# Allegro board SDR_2832.brd
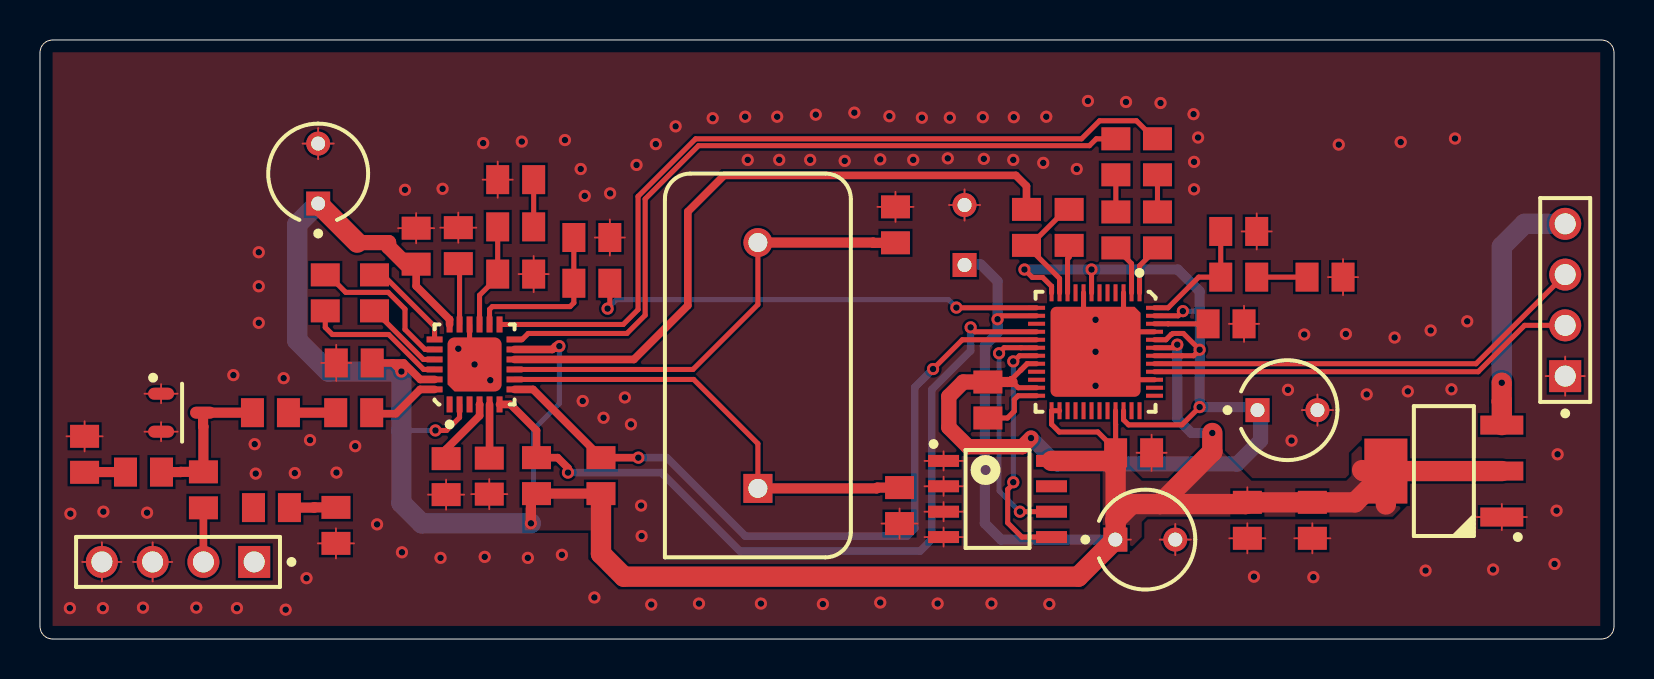
[diagram p0: board, top side]
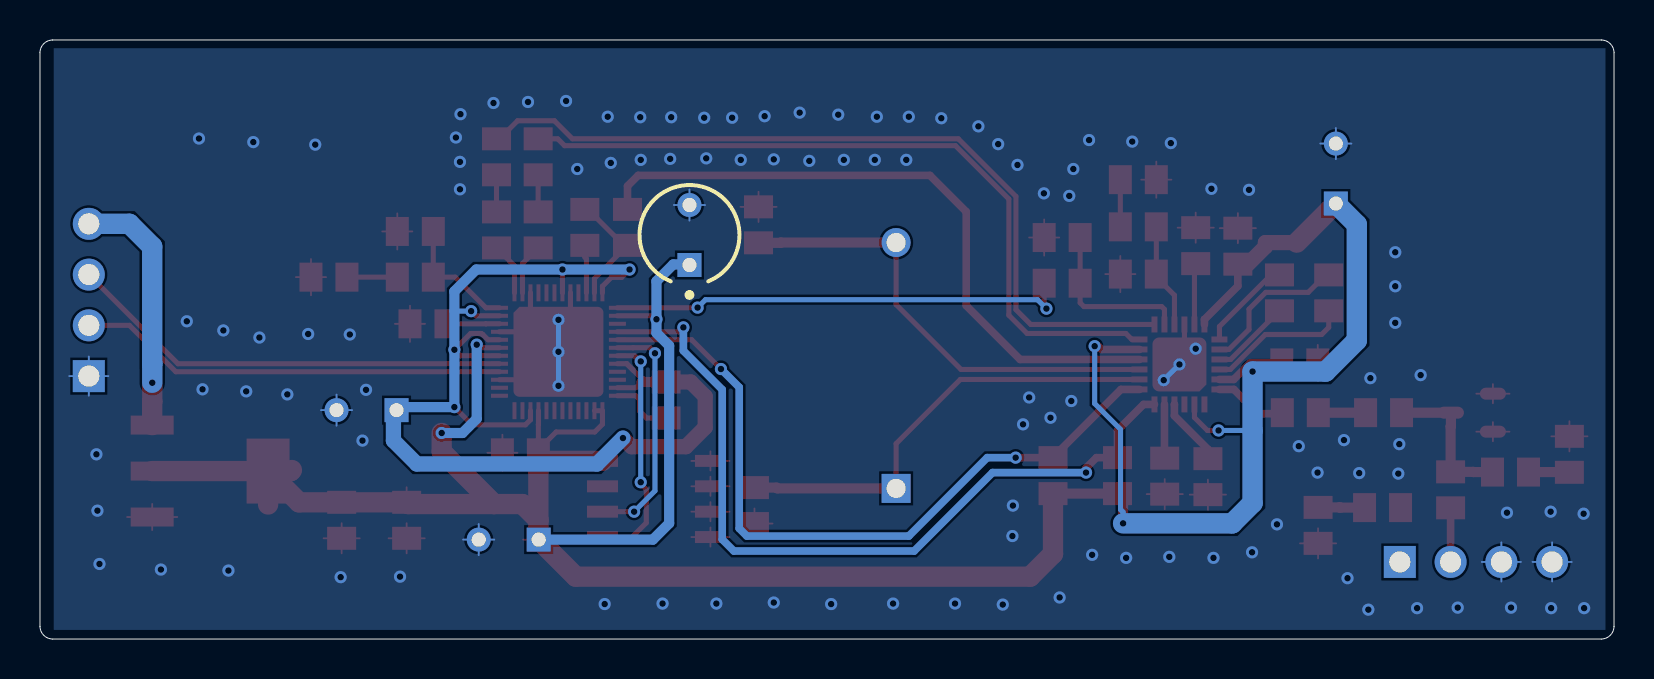
[diagram p1: board, bottom side, seen from below]

Outline 78.74 x 29.97 mm; copper layers: TOP, BOTTOM. Coordinates in mm from the lower left corner of the outline.
Outline path: 0,29.34 arc(0.19,29.79) 0.63,29.97 78.1,29.97 arc(78.55,29.79) 78.74,29.34 78.74,0.63 arc(78.55,0.19) 78.1,0 0.63,0 arc(0.19,0.19) 0,0.63 0,29.34

## Placement (name value [footprint] x y rotation side)
C1  330pF  [R0805]  11.53 11.33 0 top
C2  220pF/NC  [R0805]  2.23 9.24 270 top
C3  27pF/10nF  [R0805]  8.18 7.46 90 top
C4  NC/100nF  [R0805]  14.8 5.69 270 top
C5  1uF  [R0805]  20.32 8.12 90 top
C6  100nF  [R0805]  22.48 8.15 90 top
C7  20pF  [R0805]  43 6.68 90 top
C8  20pF  [R0805]  42.8 20.72 270 top
C9  10nF  [R0805]  15.72 13.81 180 top
C10  100nF  [R0805]  18.82 19.66 90 top
C11  100nF  [R0805]  20.93 19.68 270 top
C12  330nF  [R0805]  23.8 18.26 180 top
C13  6.8nF  [R0805]  23.8 22.98 0 top
C14  100nF  [R0805]  53.82 20.47 90 top
C15  100nF  [R0805]  55.9 20.47 90 top
C16  100nF  [R0805]  27.61 20.09 0 top
C17  220uF  [CAPPRD300W51D500H1295P]  62.4 11.45 0 top
C18  6.8nF/NC  [R0805]  49.35 20.6 90 top
C19  10uF  [CAPPRD300W51D500H1295P]  13.92 23.29 90 top
C20  0.1uF  [CAPPRD300W51D500H1295P]  55.29 4.98 0 top
C22  330nF  [R0805]  59.97 20.39 180 top
C23  6.8nF  [R0805]  64.28 18.11 180 top
C26  100nF  [R0805]  59.33 15.77 0 top
C27  100nF  [R0805]  54.71 9.32 180 top
C28  100nF  [R0805]  63.65 5.94 270 top
C29  330pF  [R0805]  60.4 5.94 90 top
C30  10uF  [CAPPRD300W51D500H1295P]  46.25 20.22 90 bottom
D1  BAV99/SOT  [SOT95P237X112-3N]  7.11 11.33 0 top
J1  HEADER 4  [HDRV4W64P254_1X4_1016X254X838P]  76.3 13.15 90 top
J2  HEADER 4  [HDRV4W64P254_1X4_1016X254X838P]  10.72 3.86 180 top
L1  8.2nH  [R0805]  15.69 11.33 0 top
L2  100nH/NC  [R0805]  5.18 8.35 0 top
L3  NC/180nH  [R0805]  11.58 6.58 0 top
L4  150nH  [R0805]  14.27 17.32 90 top
L5  150nH  [R0805]  16.74 17.32 90 top
L6  4.7uH  [R0805]  47.42 11.96 90 top
R2  1.8K  [R0805]  23.8 20.62 0 top
R3  10K  [R0805]  27.61 17.8 0 top
R4  220  [R0805]  55.9 24.13 270 top
R5  220  [R0805]  53.82 24.13 270 top
R7  NC/100  [R0805]  51.48 20.6 270 top
R8  1.8K  [R0805]  59.97 18.11 0 top
R9  4.7K  [R0805]  28.06 8.18 90 top
R10  4.7K  [R0805]  24.84 8.18 270 top
U1  RTL2832U  [RTL2832U_QFN48]  52.8 14.37 270 top
U2  R820t  [R820T]  21.74 13.74 90 top
U3  24C02/SO8  [AT24C02_SOP8]  47.9 7.01 0 top
U4  AMS1117  [AMS1117_SOT223]  70.23 8.4 180 top
Y1  28.8MHz  [OSC_2PIN]  35.91 13.69 90 top

## Library data of the parts
C1-C16 C18 C22 C23 C26-C29 = CAPACITOR NON-POL
C17 C19 C20 C30 = CAP
D1 = BAV99/SOT
J1 J2 = HEADER 4
L1-L6 = INDUCTOR AUDIO
R2-R5 R7-R10 = R
U1 = RTL2832U
U2 = R820t
U3 = 24C02/SO8_0
U4 = AMS1117
Y1 = CRYSTAL

## Footprints (pads in the part's own frame, mm; a bottom-side part is the same pattern mirrored in y, then rotated)
AMS1117_SOT223
  rect 2.15x0.95 smd: 1(-2.9,2.3) 2(-2.9,0) 3(-2.9,-2.3)
  rect 2.15x3.25 smd: 4(2.9,0)
AT24C02_SOP8
  rect 1.55x0.6 smd: 1(-2.7,1.905) 2(-2.7,0.635) 3(-2.7,-0.635) 4(-2.7,-1.905) 5(2.7,-1.905) 6(2.7,-0.635) 7(2.7,0.635) 8(2.7,1.905)
CAPPRD300W51D500H1295P
  rect 1.2x1.2 hole 0.7: 1(-1.5,0)
  round 1.2 hole 0.7: 2(1.5,0)
HDRV4W64P254_1X4_1016X254X838P
  rect 1.6x1.6 hole 1.05: 1(0,0)
  round 1.6 hole 1.05: 2(2.54,0) 3(5.08,0) 4(7.62,0)
OSC_2PIN
  rect 1.45x1.45 hole 0.95: 1(-6.15,0)
  round 1.45 hole 0.95: 2(6.15,0)
R0805
  rect 1.15x1.45 smd: 1(-0.9,0) 2(0.9,0)
R820T
  rect 0.8x0.3 smd: 1(-2,1.25) 2(-2,0.75) 3(-2,0.25) 4(-2,-0.25) 5(-2,-0.75) 6(-2,-1.25) 13(2,-1.25) 14(2,-0.75) 15(2,-0.25) 16(2,0.25) 17(2,0.75) 18(2,1.25)
  rect 0.3x0.8 smd: 7(-1.25,-2) 8(-0.75,-2) 9(-0.25,-2) 10(0.25,-2) 11(0.75,-2) 12(1.25,-2) 19(1.25,2) 20(0.75,2) 21(0.25,2) 22(-0.25,2) 23(-0.75,2) 24(-1.25,2)
  custom 2.7x2.7 smd: 25(0,0)
RTL2832U_QFN48
  rect 0.85x0.2 smd: 1(-2.95,2.2) 2(-2.95,1.8) 3(-2.95,1.4) 4(-2.95,1) 5(-2.95,0.6) 6(-2.95,0.2) 7(-2.95,-0.2) 8(-2.95,-0.6) 9(-2.95,-1) 10(-2.95,-1.4) 11(-2.95,-1.8) 12(-2.95,-2.2) 25(2.95,-2.2) 26(2.95,-1.8) 27(2.95,-1.4) 28(2.95,-1) 29(2.95,-0.6) 30(2.95,-0.2) 31(2.95,0.2) 32(2.95,0.6) 33(2.95,1) 34(2.95,1.4) 35(2.95,1.8) 36(2.95,2.2)
  rect 0.2x0.85 smd: 13(-2.2,-2.95) 14(-1.8,-2.95) 15(-1.4,-2.95) 16(-1,-2.95) 17(-0.6,-2.95) 18(-0.2,-2.95) 19(0.2,-2.95) 20(0.6,-2.95) 21(1,-2.95) 22(1.4,-2.95) 23(1.8,-2.95) 24(2.2,-2.95) 37(2.2,2.95) 38(1.8,2.95) 39(1.4,2.95) 40(1,2.95) 41(0.6,2.95) 42(0.2,2.95) 43(-0.2,2.95) 44(-0.6,2.95) 45(-1,2.95) 46(-1.4,2.95) 47(-1.8,2.95) 48(-2.2,2.95)
  custom 4.5x4.5 smd: 49(0,0)
SOT95P237X112-3N
  oval 1.3x0.6 smd: 1(-1.05,0.95) 2(-1.05,-0.95) 3(1.05,0)

## Nets
GND: C2.1 C4.2 C5.1 C6.1 C7.1 C8.1 C9.2 C10.2 C11.1 C12.1 C13.1 C16.2 C17.2 C19.2 C20.2 C22.1 C23.1 C26.2 C27.1 C28.2 C29.1 C30.2 D1.1 D1.2 J1.1 J2.3 J2.4 U1.3(GND_1) U1.8(GND_2) U1.39(GND_4) U1.45(GND_3) U1.49(PAD) U2.16(GND_16) U2.25(PAD) U3.1(A0) U3.2(A1) U3.3(A2) U3.4(GND) U4.1(GND)
VCC1V2: C17.1 L6.2 U1.7(1R2V_1) U1.12(1R2V_2) U1.20(1R2V_3) U1.23(FB1R2V) U1.34(1R2V_4) U1.42(1R2V_5) U1.44(1R2V_6) U1.47(1R2V_7)
VCC3V3: C9.1 C10.1 C19.1 C20.1 C27.2 C28.1 C29.2 C30.1 R9.1 R10.2 U1.14(3R3V_1) U1.25(DC_IN_1) U1.26(DC_IN_2) U1.33(3R3V_2) U1.43(3R3V_3) U2.2(VCC_2) U2.11(VCC_11) U2.18(VCC_18) U2.23(VCC_23) U3.8(VCC) U4.2(VOUT) U4.4(OUT)
AGC: R3.2 U1.13(AGC1)
ANT+5V: C4.1 L3.2
AUX_CLK: C18.2 U2.10(CLK_OUT)
IF_N: C14.1 U1.2(IF_N)
IF_P: C15.1 U1.1(IF_P)
RF_IN: C3.1 J2.2
SCL: R10.1 U1.16(SCLK1) U2.6(SCL)
SDA: R9.2 U1.17(SDA1) U2.7(SDA)
USB_5V: J1.4 U4.3(VIN)
USB_DM: J1.3 U1.41(USB_DM)
USB_DP: J1.2 U1.40(USB_DP)
N00923: R5.1 U2.12(IF_N)
N01579: L1.2 U2.24(RF_IN)
N01613: C1.2 L1.1
N01685: C1.1 C3.2 D1.3 L2.2
N01803: C2.2 L2.1
N02319: C5.2 U2.4(DET1)
N02329: C6.2 U2.5(DET2)
N02500: C8.2 U2.9(XTAL_O) Y1.2
N02507: C7.2 U2.8(XTAL_I) Y1.1
N03111: L4.1 U2.22(TF1P)
N03115: L5.1 U2.21(TF1N)
N03119: L5.2 U2.19(TF2N)
N03131: L4.2 U2.20(TF2P)
N03936: C11.2 U2.17(VDD_PLL)
N04054: C12.2 R2.1 U2.15(CP)
N04195: C13.2 R2.2
N04932: C16.1 R3.1 U2.14(IF_AGC)
N05012: R4.1 U2.13(IF_P)
N05567: C15.2 R4.2
N05644: C14.2 R5.2
N06557: L6.1 U1.24(DCSW)
N08567: C18.1 R7.1 U1.11(XTAL_I)
N08778: R7.2 U1.10(XTAL_O)
N09947: C26.1 U1.46(FLTC)
N10241: C22.2 R8.1 U1.48(FLTR)
N12143: C23.2 R8.2
N12664: U1.18(SCLK2) U3.6(SCL)
N12944: U1.19(SDA2) U3.5(SDA)

Pads without a net: J2 1; L3 1; U1 4 5 6 9 15 21 22 27 28 29 30 31 32 35 36 37 38; U2 1 3; U3 7

## Via types
v1: diameter 0.61, hole 0.33, TOP to BOTTOM, 132 vias

## Routing (per net, layer and track width the routed paths; a pad name or vN(x,y) marks a point on that pad's centre or on a via; arc(x,y) is an arc through that point)
GND: length 148.1
  TOP w0.089: U3.1 45.2,9.39 ; U3.1 46.15,8.91 ; U3.1 44.25,8.91 ; U3.1 45.2,8.43 ; C10.2 19.72,20.56 ; C10.2 17.91,20.56 ; C10.2 18.82,21.31 ; C10.2 18.82,19.8 ; J1.1 76.3,14.13 ; J1.1 75.32,13.15 ; J1.1 76.3,12.18 ; J1.1 77.28,13.15 ; 14.8,4.03 C4.2 ; C4.2 13.9,4.79 ; C4.2 15.71,4.79 ; C4.2 14.8,5.54 ; U4.1 74.38,6.1 ; U4.1 73.13,6.76 ; U4.1 71.87,6.1 ; U4.1 73.13,5.45 ; 21.57,7.25 C6.1 ; C6.1 22.48,6.5 ; C6.1 22.48,8 ; C6.1 23.38,7.25 ; C2.1 3.14,10.14 ; C2.1 1.33,10.14 ; C2.1 2.23,9.39 ; C2.1 2.23,10.9 ; 44.25,6.37 U3.3 ; U3.3 45.2,6.85 ; U3.3 45.2,5.89 ; U3.3 46.15,6.37 ; C17.2 64.68,11.45 ; C17.2 63.13,11.45 ; C17.2 63.9,10.67 ; C17.2 63.9,12.23 ; 2.12,3.86 J2.4 ; J2.4 3.1,4.84 ; J2.4 4.07,3.86 ; J2.4 3.1,2.88 ; U3.4 46.15,5.1 ; U3.4 44.25,5.1 ; U3.4 45.2,5.58 ; U3.4 45.2,4.62 ; C28.2 64.55,5.04 ; C28.2 63.65,5.79 ; C28.2 63.65,4.29 ; C28.2 62.75,5.04 ; 45.47,21.72 C30.2 ; C30.2 46.25,22.49 ; C30.2 47.03,21.72 ; C30.2 46.25,20.94 ; C8.1 42.8,22.38 ; C8.1 41.89,21.62 ; C8.1 42.8,20.87 ; C8.1 43.7,21.62 ; 14.82,12.91 C9.2 ; C9.2 15.57,13.81 ; C9.2 14.07,13.81 ; C9.2 14.82,14.72 ; D1.1 6.06,12.75 ; D1.1 6.06,11.8 ; D1.1 6.89,12.28 ; D1.1 5.23,12.28 ; 60.23,14.87 C26.2 ; C26.2 60.23,16.67 ; C26.2 60.98,15.77 ; C26.2 59.48,15.77 ; C11.1 21.83,20.58 ; C11.1 20.02,20.58 ; C11.1 20.93,19.83 ; C11.1 20.93,21.33 ; 60.87,19.49 C22.1 ; C22.1 61.62,20.39 ; C22.1 60.11,20.39 ; C22.1 60.87,21.3 ; C23.1 65.18,19.01 ; C23.1 64.43,18.11 ; C23.1 65.18,17.2 ; C23.1 65.94,18.11 ; 24.7,17.36 C12.1 ; C12.1 23.94,18.26 ; C12.1 25.45,18.26 ; C12.1 24.7,19.16 ; 54.85,9.32 C27.1 ; C27.1 55.61,10.22 ; C27.1 55.61,8.42 ; C27.1 56.36,9.32 ; 60.4,4.29 C29.1 ; C29.1 59.49,5.04 ; C29.1 60.4,5.79 ; C29.1 61.3,5.04 ; C16.2 28.51,20.99 ; C16.2 28.51,19.18 ; C16.2 27.75,20.09 ; C16.2 29.26,20.09 ; C20.2 56.79,5.75 ; C20.2 56.79,4.2 ; C20.2 56.01,4.98 ; C20.2 57.57,4.98 ; 22.9,22.08 C13.1 ; C13.1 22.14,22.98 ; C13.1 23.65,22.98 ; C13.1 22.9,23.89 ; 13.14,24.79 C19.2 ; C19.2 13.92,25.57 ; C19.2 14.69,24.79 ; C19.2 13.92,24.01 ; 42.1,5.78 C7.1 ; C7.1 43,6.53 ; C7.1 43.9,5.78 ; C7.1 43,5.02 ; 44.25,7.64 U3.2 ; U3.2 45.2,7.16 ; U3.2 46.15,7.64 ; U3.2 45.2,8.12 ; 6.06,9.9 D1.2 ; D1.2 6.89,10.38 ; D1.2 6.06,10.85 ; D1.2 5.23,10.38 ; 4.66,3.86 J2.3 ; J2.3 5.64,4.84 ; J2.3 6.61,3.86 ; J2.3 5.64,2.88 ; 20.32,6.47 C5.1 ; C5.1 21.22,7.22 ; C5.1 20.32,7.98 ; C5.1 19.41,7.22
  TOP w0.254: U1.3 54.2,15.77 53.8,15.37 ; U1.8 52.2,14.97 v1(52.8,14.37) ; v1(20.93,14.53) 20.95,14.53 21.49,13.99 ; v1(52.8,14.37) 53.8,15.37 ; v1(52.8,14.37) 54.2,12.97 U1.39 ; 53.8,15.37 U1.45 ; 21.49,13.99 v1(21.74,13.74) ; 21.49,13.99 U2.16
  TOP w0.508: 20.9,20.56 C11.1
  BOTTOM w0.089: J1.1 77.28,13.15 ; J1.1 75.32,13.15 ; J1.1 76.3,12.18 ; J1.1 76.3,14.13 ; 3.1,2.88 J2.4 ; J2.4 4.07,3.86 ; J2.4 3.1,4.84 ; J2.4 2.12,3.86 ; C19.2 13.92,25.57 ; C19.2 13.14,24.79 ; C19.2 14.69,24.79 ; C19.2 13.92,24.01 ; 56.79,4.2 C20.2 ; C20.2 56.79,5.75 ; C20.2 56.01,4.98 ; C20.2 57.57,4.98 ; C17.2 63.9,12.23 ; C17.2 64.68,11.45 ; C17.2 63.13,11.45 ; C17.2 63.9,10.67 ; 5.64,2.88 J2.3 ; J2.3 5.64,4.84 ; J2.3 4.66,3.86 ; J2.3 6.61,3.86 ; C30.2 46.25,22.49 ; C30.2 45.47,21.72 ; C30.2 46.25,20.94 ; C30.2 47.03,21.72
  BOTTOM w0.254: v1(21.74,13.74) v1(22.53,12.95) ; v1(52.8,12.67) v1(52.8,14.37) v1(52.8,15.97)
  vias: v1(1.5,1.55) v1(1.52,6.27) v1(3.17,6.37) v1(3.15,1.55) v1(5.15,1.57) v1(5.36,6.32) v1(7.82,1.57) v1(9.67,13.2) v1(9.85,1.55) v1(10.74,9.75) v1(10.79,8.28) v1(10.94,19.35) v1(10.94,17.65) v1(10.94,15.82) v1(12.19,13.05) v1(12.29,1.47) v1(12.75,8.3) v1(13.33,3.04) v1(13.51,9.95) v1(14.83,8.33) v1(15.77,9.65) v1(16.86,5.74) v1(18.11,4.34) v1(18.26,22.48) v1(20.04,4.06) v1(20.14,22.53) v1(22.17,24.81) v1(22.25,4.11) v1(24.1,24.89) v1(24.41,4.06) v1(26.11,4.21) v1(26.26,24.96) v1(27.05,23.52) v1(27.15,11.91) v1(27.25,22.17) v1(27.73,2.08) v1(28.19,11.07) v1(28.52,22.3) v1(29.26,12.09) v1(29.56,10.74) v1(29.84,23.72) v1(30.07,6.68) v1(30.1,5.15) v1(30.58,1.72) v1(30.81,24.76) v1(31.8,25.65) v1(32.97,1.77) v1(33.65,26.06) v1(35.28,26.13) v1(35.4,23.97) v1(36.06,1.77) v1(36.88,26.13) v1(36.98,23.97) v1(38.53,23.97) v1(38.81,26.23) v1(39.16,1.75) v1(40.26,23.92) v1(40.74,26.34) v1(42.03,24) v1(42.03,1.83) v1(42.49,26.16) v1(43.68,23.97) v1(44.12,26.08) v1(44.9,1.77) v1(45.41,24.05) v1(45.51,26.08) v1(47.16,26.11) v1(47.22,24.03) v1(47.6,1.77) v1(48.69,23.97) v1(48.71,26.11) v1(50.19,23.82) v1(50.34,26.13) v1(50.49,1.75) v1(51.86,23.52) v1(52.42,26.92) v1(54.33,26.87) v1(56.05,26.82) v1(57.71,26.26) v1(57.73,23.87) v1(57.73,22.5) v1(57.93,25.09) v1(60.73,3.12) v1(62.43,12.47) v1(62.61,9.93) v1(63.24,15.24) v1(63.7,3.1) v1(64.97,24.74) v1(65.33,15.26) v1(66.37,12.24) v1(67.76,15.08) v1(68.07,24.86) v1(68.42,12.39) v1(69.31,3.43) v1(69.57,15.44) v1(70.61,12.49) v1(70.79,25.04) v1(71.4,15.9) v1(72.69,3.48) v1(75.76,3.76) v1(75.87,6.42) v1(75.92,9.24)
VCC1V2: length 60.8
  TOP w0.254: 48.65,12.86 48.94,12.57 U1.23 ; 49.39,13.77 49.38,13.77 49.07,13.46 ; 49.39,13.77 U1.20 ; 49.39,13.77 49.07,13.46 49.07,13.46 ; U1.42 56.66,14.17 56.66,14.17 57.12,14.17 57.13,14.17 57.71,14.17 v1(58.01,14.47) 57.2,15.29 56.66,15.29 56.61,15.24 56.59,15.24 56.32,14.97 U1.44 ; U1.7 v1(52.6,18.49) ; 49.07,13.46 48.64,13.03 48.56,13.03 48.4,12.86 ; U1.34 54.2,10.97 54.46,10.72 57.12,10.72 v1(58.01,11.6) ; U1.12 50.6,17.65 50.16,18.09 49.64,18.09 v1(49.25,18.49) ; U1.47 56.94,16.17 v1(57.17,16.41)
  TOP w0.508: 48.65,12.86 L6.2
  TOP w0.762: L6.2 46.18,12.86 45.46,12.14 45.46,10.59 46.43,9.62 49.15,9.62 v1(49.58,10.06)
  BOTTOM w0.254: v1(57.17,16.41) 58.01,16.41
  BOTTOM w0.508: v1(49.25,18.49) v1(52.6,18.49) 56.92,18.49 58.01,17.4 v1(58.01,14.47) v1(58.01,11.6) 60.75,11.6 C17.1
  BOTTOM w0.762: v1(49.58,10.06) 50.87,8.76 59.89,8.76 61.06,9.93 61.06,11.3 C17.1
VCC3V3: length 167.5
  TOP w0.089: 53.79,5.75 C20.1 54.57,4.98 ; 59.49,6.84 C29.2 60.4,7.59
  TOP w0.254: U1.26 U1.25 50.6,10.74 50.99,10.36 52.92,10.36 53.81,9.47 ; v1(25.98,14.65) 25.82,14.49 25.63,14.49 ; U1.33 53.8,10.74 53.81,10.74 53.81,9.47 ; U1.14 48.08,16.17 v1(47.9,16) ; 53.81,9.47 C27.2 ; U1.43 56.74,14.57 v1(56.89,14.73) ; v1(19.78,10.44) 20.34,10.44 20.99,11.08 U2.2
  TOP w0.381: U2.23 19.02,12.99 18.2,13.81 17.65,13.81 ; U2.18 20.49,15.99 18.82,17.66 C10.1 ; C9.1 17.65,13.81 ; 17.65,13.81 v1(18.08,13.38) ; U2.11 25.63,14.49 25.79,14.65 v1(25.98,14.65)
  TOP w0.508: 53.79,5.94 53.79,5.96 53.81,5.97 ; C10.1 18.31,18.76 ; v1(24.56,5.79) 24.56,7 R10.2 R9.1
  TOP w0.762: 18.31,18.76 17.44,19.63 17.44,19.83 15.87,19.83
  TOP w1.016: 53.79,5.94 54.61,6.75 56.03,6.75 ; U4.4 67.33,8.38 ; U4.4 U4.2 ; U4.4 66.19,8.4 66.14,8.45 ; 67.33,8.38 65.78,6.84 C28.1 C29.2 60.31,6.75 56.03,6.75 ; 67.33,8.38 67.33,6.73 ; 53.81,8.56 53.45,8.91 U3.8 ; 53.81,8.56 53.81,4.99 C20.1 51.94,3.12 29.21,3.12 28.06,4.26 R9.1 ; 53.81,8.56 C27.2 ; 15.87,19.83 C19.1 ; v1(58.65,10.31) 58.65,9.37 56.03,6.75
  BOTTOM w0.254: 18.08,10.41 18.11,10.44 v1(19.78,10.44) ; v1(25.98,14.65) 25.98,11.78 24.69,10.49 24.69,6.47 24.56,6.35 v1(24.56,5.79)
  BOTTOM w0.508: C20.1 48.08,4.98 47.27,5.79 47.27,14.68 47.9,15.31 v1(47.9,16) 47.9,17.9 47.06,18.74 46.28,18.74 C30.1 ; v1(56.89,14.73) 56.89,11.02 57.6,10.31 v1(58.65,10.31)
  BOTTOM w1.016: C19.1 12.87,20.74 12.87,14.94 14.42,13.38 v1(18.08,13.38) 18.08,6.8 19.1,5.79 v1(24.56,5.79)
AGC: length 23.1
  TOP w0.254: U1.13 45.85,16.57 v1(45.84,16.58) ; v1(28.39,16.53) 28.51,16.64 R3.2
  BOTTOM w0.254: v1(28.39,16.53) 28.84,16.98 45.45,16.98 v1(45.84,16.58)
ANT+5V: length 2.3
  TOP w0.381: 13.76,6.59 13.75,6.58
  TOP w0.508: L3.2 13.69,6.58 13.7,6.59 C4.1
AUX_CLK: length 33.6
  TOP w0.381: C18.2 49.35,22.66 48.82,23.2 34.22,23.2 32.41,21.38 32.41,16.68 29.71,13.99 U2.10
IF_N: length 2.6
  TOP w0.254: C14.1 54.6,18.79 U1.2
IF_P: length 2.6
  TOP w0.254: C15.1 55,18.67 U1.1
RF_IN: length 2.7
  TOP w0.381: C3.1 J2.2
SCL: length 40.6
  TOP w0.254: v1(46.55,15.59) 46.77,15.37 U1.16
  TOP w0.381: U2.6 23.54,11.74 24.84,10.44 R10.1 25.89,9.08 26.41,8.56 v1(26.41,8.33)
  BOTTOM w0.381: v1(46.55,15.59) 46.55,14.42 44.61,12.48 44.61,4.99 44.03,4.4 35.01,4.4 31.09,8.33 v1(26.41,8.33)
SDA: length 37.4
  TOP w0.254: U1.17 46.14,14.97 v1(44.68,13.51)
  TOP w0.381: U2.7 24.67,12.49 28.04,9.12 28.04,9.1 R9.2 v1(29.93,9.08)
  BOTTOM w0.381: v1(44.68,13.51) 43.76,12.6 43.76,5.53 43.38,5.15 35.28,5.15 31.35,9.08 v1(29.93,9.08)
USB_5V: length 12.6
  TOP w1.016: v1(73.12,12.82) 73.12,11.88 73.13,11.88 U4.3
  BOTTOM w1.016: v1(73.12,12.82) 73.12,13.76 73.13,13.77 73.13,19.64 74.27,20.77 J1.4
USB_DM: length 22.4
  TOP w0.254: U1.41 71.84,13.77 J1.3
USB_DP: length 21.5
  TOP w0.254: U1.40 71.95,13.37 74.27,15.69 J1.2
N00923: length 37.6
  TOP w0.254: U2.12 24.12,14.99 24.42,15.29 29.36,15.29 30.27,16.2 30.27,22.02 32.94,24.68 52.5,24.68 52.84,25.03 R5.1
N01579: length 3.7
  TOP w0.381: U2.24 19.02,12.49 17.8,11.27 16.64,11.27 L1.2
N01613: length 2.4
  TOP w0.508: C1.2 L1.1
N01685: length 7.5
  TOP w0.508: L2.2 7.03,8.35 7.05,8.36 C3.2 8.18,10.63 8.16,10.64 D1.3 C1.1
N01803: length 2.1
  TOP w0.508: L2.1 2.24,8.35 C2.2
N02319: length 3.4
  TOP w0.381: C5.2 20.32,9.5 21.99,11.17 21.99,11.73 U2.4
N02329: length 2.7
  TOP w0.381: U2.5 22.49,9.06 C6.2
N02500: length 23.5
  TOP w0.254: Y1.2 35.91,16.74 32.67,13.49 U2.9
  TOP w0.508: Y1.2 41.68,19.84 41.69,19.82 C8.2
N02507: length 22.8
  TOP w0.254: U2.8 32.7,12.99 35.91,9.78 Y1.1
  TOP w0.508: Y1.1 41.85,7.54 41.89,7.58 C7.2
N03111: length 7.2
  TOP w0.254: U2.22 19.19,13.49 17.44,15.24 14.63,15.24 14.27,15.59 L4.1
N03115: length 4.1
  TOP w0.254: 16.68,16.43 16.74,16.43 16.75,16.42 ; U2.21 19.18,13.99 16.75,16.42 ; 16.75,16.42 L5.1
N03119: length 4.7
  TOP w0.254: U2.19 19.74,15.64 17.17,18.21 16.75,18.21 L5.2
N03131: length 7.6
  TOP w0.254: L4.2 14.42,18.22 15.3,17.34 17.42,17.34 18.26,16.51 18.26,15.49 19.26,14.49 U2.20
N03936: length 3.1
  TOP w0.254: C11.2 20.98,18.73 20.98,18.28 20.99,18.27 U2.17
N04054: length 5.3
  TOP w0.254: U2.15 21.99,17.2 22.9,18.11 C12.2 R2.1
N04195: length 2.4
  TOP w0.254: R2.2 C13.2
N04932: length 8.4
  TOP w0.254: C16.1 R3.1 26.71,16.82 26.52,16.63 22.63,16.63 22.49,16.49 U2.14
N05012: length 40.8
  TOP w0.254: U2.13 29.17,15.74 29.92,16.48 29.92,22.15 32.8,25.03 52.1,25.03 53.01,25.93 54.85,25.93 55.75,25.03 R4.1
N05567: length 1.9
  TOP w0.254: C15.2 R4.2
N05644: length 1.9
  TOP w0.254: C14.2 R5.2
N06557: length 3.2
  TOP w0.254: L6.1 48.4,11.06 48.74,11.4 48.74,11.98 48.93,12.17 U1.24
N08567: length 5.9
  TOP w0.254: R7.1 51.33,21.5 49.53,19.7 C18.1 51,18.04 U1.11
N08778: length 2.4
  TOP w0.254: U1.10 51.4,19.02 51.48,19.1 R7.2
N09947: length 2.7
  TOP w0.254: U1.46 56.43,15.77 56.44,15.77 C26.1
N10241: length 6.2
  TOP w0.254: U1.48 56.43,16.57 57.97,18.11 R8.1 C22.2
N12143: length 2.5
  TOP w0.254: C23.2 R8.2
N12664: length 11.9
  TOP w0.254: v1(47.98,14.3) 47.98,14.32 48.23,14.58 49.07,14.58 49.08,14.57 U1.18 ; v1(49.02,6.37) U3.6
  BOTTOM w0.254: v1(47.98,14.3) 47.98,7.41 v1(49.02,6.37)
N12944: length 12
  TOP w0.254: v1(48.69,13.89) 48.71,13.89 49,14.17 U1.19 ; v1(48.69,7.85) 48.69,7.77 48.41,7.49 48.41,5.81 49.12,5.1 U3.5
  BOTTOM w0.254: v1(48.69,13.89) v1(48.69,7.85)

## Copper pours and planes (outline as drawn; the poured copper is in the pictures)
GND on TOP: 0.63,29.36 0.63,0.66 78.05,0.66 78.05,29.36
GND on BOTTOM: 0.43,29.56 0.43,0.45 78.05,0.45 78.05,29.56
VCC3V3 on TOP: 53.16,8.79 53.16,4.7 53.34,4.52 54.53,4.52 55.11,5.1 55.11,5.86 55.37,6.12 67.66,6.12 68.35,6.8 68.35,9.39 67.81,9.93 66.27,9.93 65.6,9.27 65.6,8.18 65.35,7.92 60.6,7.92 58.67,9.85 56.97,8.15 56.97,7.92 55.11,7.92 54,9.04 53.41,9.04
VCC3V3 on TOP: 24.25,7.44 24.25,5.43 28.32,5.43 28.32,7.44

## Text on the board
DISPLAY_TOP: FIGURE | SIZE | 13.0 | 27.56 | 37.4 | 41.34 | DRILL CHART: TOP to BOTTOM | ALL UNITS ARE IN MILS | PLATED | QTY | 132 | 4 | 1 | 2 | 6
